# Altium PCB MCB4.PcbDoc
Units mm, origin at the board's own origin, x right, y up, seen from the top; angles counter-clockwise.
Board outline 35.94 x 20.12 mm, 2 copper layers (Top Layer, Bottom Layer); 55 components, 61 nets, 267 pads, 169 vias.
Unrouted connection lines stored in the file: 1.
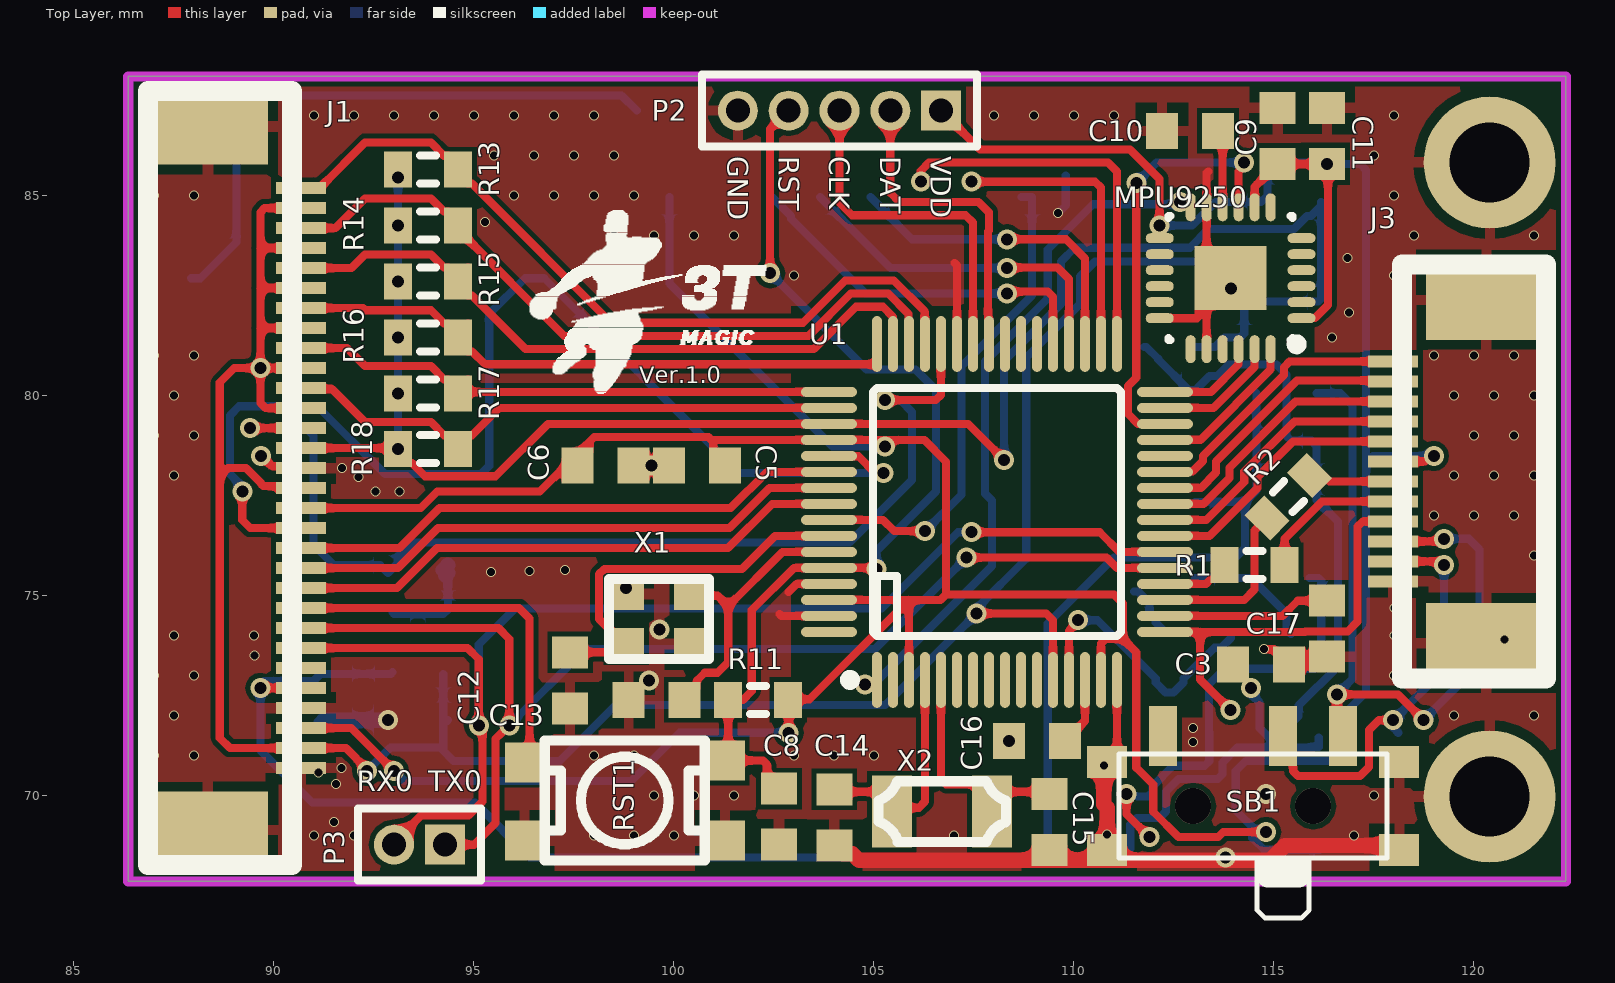
[diagram p0: Top Layer view]
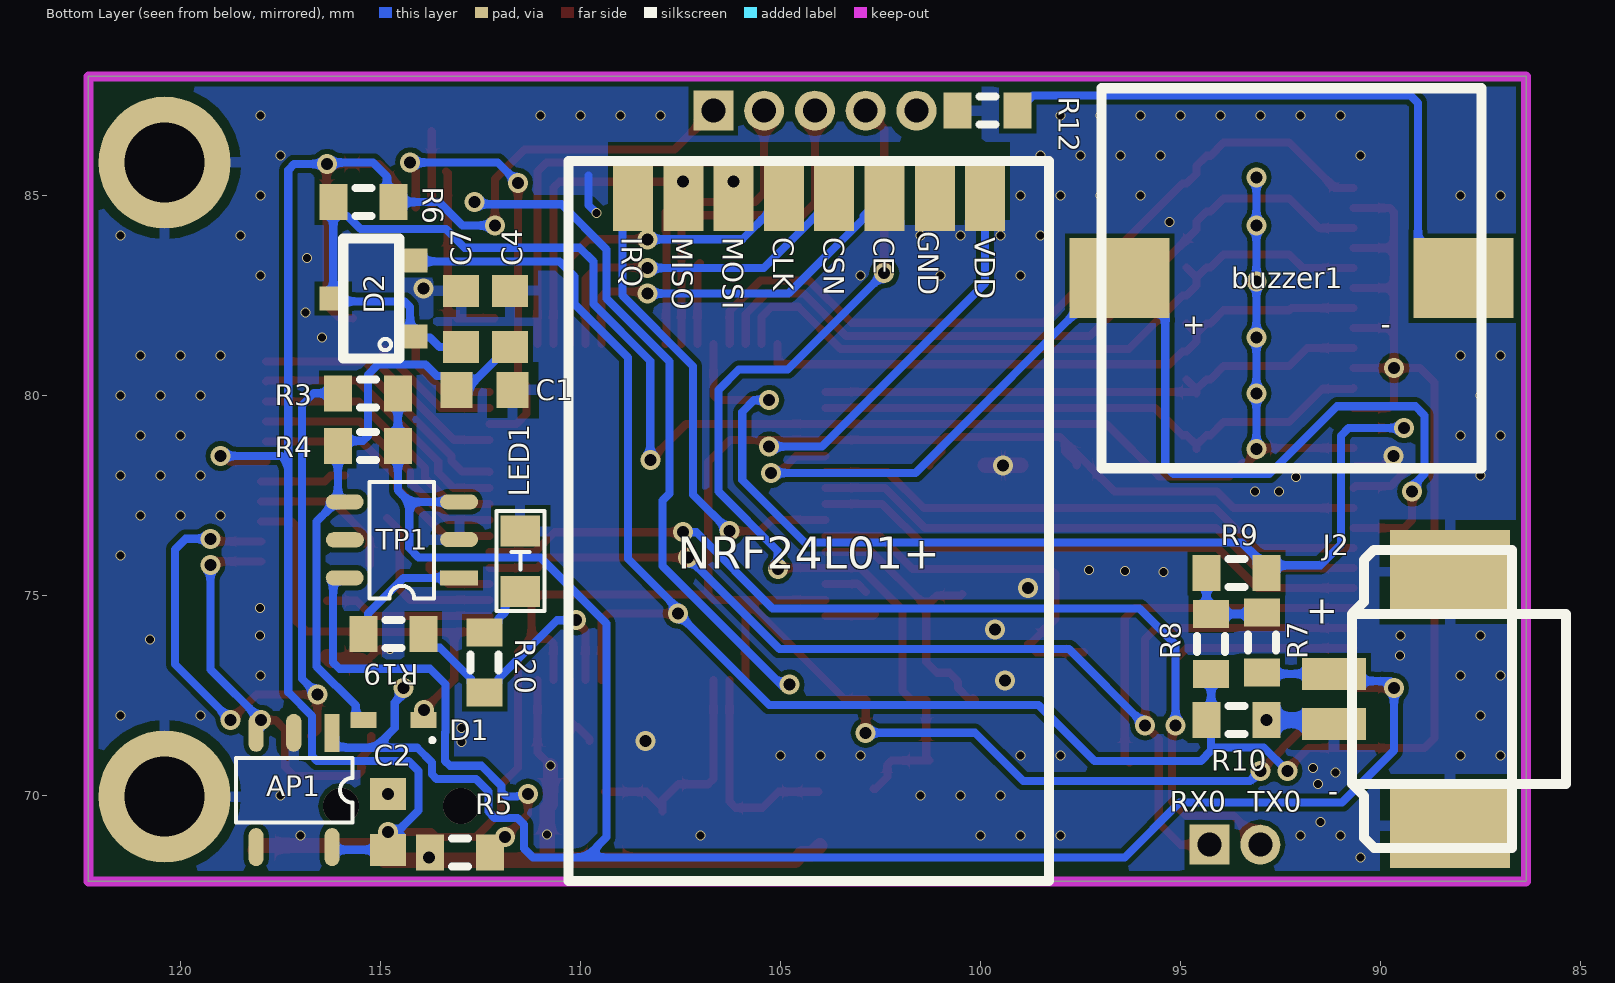
[diagram p1: Bottom Layer view, seen from below]

## Layer stack, top to bottom
Top Solder: solder mask 0.0102, Solder Resist, Dk 3.5
Top Layer: signal copper 0.0356
Dielectric 1: dielectric 0.32, FR-4, Dk 4.8
Bottom Layer: signal copper 0.0356
Bottom Solder: solder mask 0.0102, Solder Resist, Dk 3.5

## Board outline
86.36,67.853 86.36,87.975 122.301,87.975 122.301,67.853

## Design rules (kind name [scope] priority, off if disabled: settings)
Clearance [All] p1: gap=0.127 ignorepadtopadclearanceinfootprint=FALSE
PolygonConnect [All] p1: connectstyle=Relief reliefconductorwidth=0.254 reliefentries=4 polygonreliefangle="90 Angle" airgapwidth=0.254
RoutingVias [All] p1: holewidth=0.711 width=1.27 viastyle="Through Hole" minholewidth=0.2 minwidth=0 maxholewidth=1.016 maxwidth=1.27
SolderMaskExpansion [All] p1: expansion=0.102
Width [All] p1: maxlimit=1.016 minlimit=0.178 preferedwidth=0.254
30 further rules are at their usual default settings.

## Components (designator, comment, footprint, x,y, rotation, side; value= is the part's Value field where it differs from the comment)
AP1 "AP2112" SOT-23-5 115.7,70.937 r270 bottom
buzzer1 "Buzzer" HN9650B-3 96.93,78.266 r90 bottom
C1 "Cap Semi" 1608[0603] 112.395,80.137 r0 bottom value=10uF
C2 "Cap Semi" 1608[0603] 114.808,69.342 r270 bottom value=1uF
C3 "Cap Semi" 1608[0603] 114.681,73.279 r180 top value=10uF
C4 "Cap Semi" 1608[0603] 111.76,81.915 r270 bottom value=1uF
C5 "Cap Semi" 1608[0603] 100.58,78.255 r0 top value=10uF
C6 "Cap Semi" 1608[0603] 98.294,78.255 r180 top value=0.1uF
C7 "Cap Semi" 1608[0603] 112.982,81.915 r270 bottom value=1uF
C8 "Cap Semi" 1608[0603] 102.628,69.469 r90 top value=0.1uF
C9 "Cap Semi" 1608[0603] 115.09,86.487 r270 top value=10nF
C10 "Cap Semi" 1608[0603] 112.903,86.614 r0 top value=0.1uF
C11 "Cap Semi" 1608[0603] 116.332,86.487 r270 top value=0.1uF
C12 "Cap Semi" 1608[0603] 97.409,72.88 r270 top value=20pF
C13 "Cap Semi" 1608[0603] 99.568,72.39 r180 top value=20pF
C14 "Cap Semi" 1608[0603] 104.013,69.452 r270 top value=20pF
C15 "Cap Semi" 1608[0603] 109.387,69.342 r270 top value=20pF
C16 "Cap Semi" 1608[0603] 109.077,71.36 r0 top value=1uF
C17 "Cap Semi" 1608[0603] 116.332,74.168 r90 top value=1uF
D1 "Schottky" SOD-523 114.681,71.882 r0 bottom
D2 "Vref" SOT-23 116.181,82.423 r90 bottom
J1 "Plug8" FPC0.5-30PS 90.678,85.185 r270 top
J2 "Plug2" Terminal_block_2pin_1.25mm_SMD 88.265,72.39 r270 bottom
J3 "Plug8" FPC0.5-12PS 117.983,75.351 r90 top
LED1 "RED" SMD-0603_LED 111.506,76.608 r270 bottom
MPU9250 "24Pin" "QFN_24PIN _1" 113.919,82.931 r180 top (schematic designator MPU-1)
NRF24L01+ "NRF24L01" NRF24L01_Module_SMD 98.286,67.863 r0 bottom (schematic designator NRF*1)
P2 "MHDR1X5" MHDR1X5 106.68,87.122 r180 top
P3 "MHDR1X2" MHDR1X2 94.275,68.769 r180 top
R1 "Res3" J1-0603 114.519,75.759 r0 top value=33
R2 "Res3" J1-0603 115.363,77.47 r45 top value=33
R3 "Res3" J1-0603 115.316,80.055 r0 bottom value=100K
R4 "Res3" J1-0603 115.316,78.74 r180 bottom value=100k
R5 "Res3" J1-0603 113.013,68.58 r180 bottom value=1.65k
R6 "Res3" J1-0603 115.431,84.836 r180 bottom value=1K
R7 "Res3" J1-0603 92.964,73.83 r270 bottom value=75k
R8 "Res3" J1-0603 94.234,73.787 r90 bottom value=100k
R9 "Res3" J1-0603 93.599,75.565 r0 bottom value=100k
R10 "Res3" J1-0603 93.599,71.882 r0 bottom value=0
R11 "Res3" J1-0603 102.108,72.39 r180 top value=10K
R12 "Res3" J1-0603 99.822,87.122 r180 bottom value=100
R13 "Res3" J1-0603 93.853,85.643 r180 top value=10K
R14 "Res3" J1-0603 93.853,84.246 r180 top value=10K
R15 "Res3" J1-0603 93.853,82.849 r180 top value=10K
R16 "Res3" J1-0603 93.853,81.452 r180 top value=10K
R17 "Res3" J1-0603 93.853,80.055 r180 top value=10K
R18 "Res3" J1-0603 93.853,78.658 r180 top value=10K
R19 "Res3" J1-0603 114.681,74.041 r180 bottom value=160
R20 "Res3" J1-0603 112.395,73.322 r270 bottom value=870
RST1 "SPST" "TACK-SW_SMD 2P 4x3mm_2" 100.773,71.374 r270 top
SB1 "SPDT" SS-SK-02P 114.427,69.723 r0 top
TP1 "TP-4057" SOT-23-6 113.665,74.93 r0 bottom
U1 "NUC240SE3AE" MCU_LQFP_64_7x7 108.077,77.089 r90 top
X1 "Xtal" 2520S 98.807,75.037 r0 top value=12M
X2 "Xtal" FC-135 106.36,67.896 r0 top value=32.768k

## Footprints (in the part's own frame and the unit in brackets; to place one, negate y for a bottom-side part, rotate by r counter-clockwise, add the part's x,y. Pads: shape width x height; smd on the part's side, far side on the other; paste and mask are expansions set on the pad)
1608[0603] [mm] "Chip Capacitor, Body 1.6x0.8mm, IPC High Density"
  rect 0.8x0.9 smd: 1(-0.7,0) 2(0.7,0)
  body extent -0.87,-0.48 0.87,0.48, height 1.3
2520S [mm]
  rect 0.9x0.8 smd: 1(0,-1.25) 2(1.65,0) ""(0,0) ""(1.65,-1.25)
  silkscreen extent -0.43,-1.63 2.07,0.37
FC-135 [mm]
  rect 1x1.8 smd: 1(-0.91,1.7) 2(1.59,1.7)
  silkscreen extent -1.24,0.94 1.94,2.46
FPC0.5-12PS [mm]
  rect 0.3x1.25 smd: 1(0,0) 2(0.5,0) 3(1,0) 4(1.5,0) 5(2,0) 6(2.5,0) 7(3,0) 8(3.5,0) 9(4,0) 10(4.5,0) 11(5,0) 12(5.5,0)
  rect 2x3 smd: ""(-1.54,-2.325) ""(7.04,-2.325)
  silkscreen extent -2.43,-3.82 7.92,-0.22
FPC0.5-30PS [mm]
  rect 0.3x1.25 smd: 1(0,0) 2(0.5,0) 3(1,0) 4(1.5,0) 5(2,0) 6(2.5,0) 7(3,0) 8(3.5,0) 9(4,0) 10(4.5,0) 11(5,0) 12(5.5,0) 13(6,0) 14(6.5,0) 15(7,0) 16(7.5,0) 17(8,0) 18(8.5,0) 19(9,0) 20(9.5,0) 21(10,0) 22(10.5,0) 23(11,0) 24(11.5,0) 25(12,0) 26(12.5,0) 27(13,0) 28(13.5,0) 29(14,0) 30(14.5,0)
  rect 1.9x3 smd: ""(-1.54,-2.325) ""(16.04,-2.325)
  silkscreen extent -2.42,-3.83 16.93,-0.23
HN9650B-3 [mm]
  rect 2x2.5 smd: 1(4.665,-0.41) 2(4.665,-9.005)
  silkscreen extent -0.08,-9.46 9.42,0.04
J1-0603 [mm] "Chip Resistor, Body 1.6x0.8mm, IPC High Density"
  rect 0.7x0.9 smd: 1(-0.75,0) 2(0.75,0)
  silkscreen extent -0.2,-0.35 0.2,0.35, body extent -0.85,-0.48 0.85,0.48, height 0.9
MCU_LQFP_64_7x7 [mm]
  oval 1.4x0.25 smd: 1(-4.2,3) 2(-4.2,2.6) 3(-4.2,2.2) 4(-4.2,1.8) 5(-4.2,1.4) 6(-4.2,1) 7(-4.2,0.6) 8(-4.2,0.2) 9(-4.2,-0.2) 10(-4.2,-0.6) 11(-4.2,-1) 12(-4.2,-1.4) 13(-4.2,-1.8) 14(-4.2,-2.2) 15(-4.2,-2.6) 16(-4.2,-3) 33(4.2,-3) 34(4.2,-2.6) 35(4.2,-2.2) 36(4.2,-1.8) 37(4.2,-1.4) 38(4.2,-1) 39(4.2,-0.6) 40(4.2,-0.2) 41(4.2,0.2) 42(4.2,0.6) 43(4.2,1) 44(4.2,1.4) 45(4.2,1.8) 46(4.2,2.2) 47(4.2,2.6) 48(4.2,3)
  oval 0.25x1.4 smd: 17(-3,-4.2) 18(-2.6,-4.2) 19(-2.2,-4.2) 20(-1.8,-4.2) 21(-1.4,-4.2) 22(-1,-4.2) 23(-0.6,-4.2) 24(-0.2,-4.2) 25(0.2,-4.2) 26(0.6,-4.2) 27(1,-4.2) 28(1.4,-4.2) 29(1.8,-4.2) 30(2.2,-4.2) 31(2.6,-4.2) 32(3,-4.2) 49(3,4.2) 50(2.6,4.2) 51(2.2,4.2) 52(1.8,4.2) 53(1.4,4.2) 54(1,4.2) 55(0.6,4.2) 56(0.2,4.2) 57(-0.2,4.2) 58(-0.6,4.2) 59(-1,4.2) 60(-1.4,4.2) 61(-1.8,4.2) 62(-2.2,4.2) 63(-2.6,4.2) 64(-3,4.2)
  silkscreen extent -4.32,-3.1 3.1,3.8, body extent -3.5,-3.5 3.5,3.5, height 1.6
MHDR1X2 [mm] "Connector; Header; 2 Position"
  rect 1x1 hole 0.6: 1(0,0)
  round 1 hole 0.6: 2(1.27,0)
  silkscreen extent -0.9,-0.9 2.17,0.9
MHDR1X5 [mm] "Connector; Header; 5 Position"
  rect 1x1 hole 0.6: 1(0,0)
  round 1 hole 0.6: 2(1.27,0) 3(2.54,0) 4(3.81,0) 5(5.08,0)
  silkscreen extent -0.9,-0.9 5.98,0.9
NRF24L01_Module_SMD [mm]
  rect 1x1.7 smd: 1(1.6,-17.1) 2(2.857,-17.1) 3(4.114,-17.1) 4(5.371,-17.1) 5(6.629,-17.1) 6(7.886,-17.1) 7(9.143,-17.1) 8(10.4,-17.1)
  silkscreen extent 0,-18 12.02,0
"QFN_24PIN _1" [mm]
  oval 0.7x0.249 smd: 1(-1.772,1) 2(-1.772,0.6) 3(-1.772,0.2) 4(-1.772,-0.2) 5(-1.772,-0.6) 6(-1.772,-1) 13(1.772,-1) 14(1.772,-0.6) 15(1.772,-0.2) 16(1.772,0.2) 17(1.772,0.6) 18(1.772,1)
  oval 0.249x0.7 smd: 7(-1,-1.772) 8(-0.6,-1.772) 9(-0.2,-1.772) 10(0.2,-1.772) 11(0.6,-1.772) 12(1,-1.772) 19(1,1.772) 20(0.6,1.772) 21(0.2,1.772) 22(-0.2,1.772) 23(-0.6,1.772) 24(-1,1.772)
  rect 1.8x1.6 smd: 25(0,0)
  silkscreen extent -1.77,-1.55 1.55,1.78, body extent -1.55,-1.55 1.55,1.55, height 1
SMD-0603_LED [mm]
  rect 0.78x0.98 smd: 1(0,0) 2(1.51,0)
  silkscreen extent -0.5,-0.6 2,0.6
SOD-523 [mm] "SODFL, 2-Leads, Body 0.80x1.60mm, IPC Medium Density"
  rect 0.65x0.4 smd: 1(-0.75,0) 2(0.75,0)
  silkscreen extent -1.02,0.45 -0.93,0.55, body extent -0.65,-0.45 0.65,0.45, height 0.65
SOT-23 [mm]
  rect 0.6x0.7 smd: 1(-0.95,-2) 2(0,0) 3(0.95,-2)
  silkscreen extent -1.5,-1.65 1.5,-0.25
SOT-23-5 [mm]
  rect 0.95x0.38 smd: 1(-0.63,-0.51)
  oval 0.95x0.38 smd: 2(-0.63,-1.47) 3(-0.63,-2.41) 4(2.23,-2.41) 5(2.23,-0.51)
  silkscreen extent 0,-2.91 1.61,0
SOT-23-6 [mm]
  rect 0.95x0.38 smd: 1(-0.63,-0.51)
  oval 0.95x0.38 smd: 2(-0.63,-1.47) 3(-0.63,-2.41) 4(2.23,-2.41) 5(2.227,-1.461) 6(2.23,-0.51)
  silkscreen extent 0,-2.91 1.61,0
SS-SK-02P [mm]
  rect 0.7x1.5 smd: 1(-2.195,1.76) 2(0.805,1.76) 3(2.305,1.76)
  rect 1x0.8 smd: ""(-3.595,-1.09) ""(-3.595,1.11) ""(3.705,-1.09) ""(3.705,1.11)
  silkscreen extent -3.29,-2.79 3.41,1.31
"TACK-SW_SMD 2P 4x3mm_2" [mm]
  rect 1x1 smd: 1(0.5,0.5) 1(0.55,-4.5) 2(2.5,0.5) 2(2.5,-4.5)
  silkscreen extent 0,-4 3,0
Terminal_block_2pin_1.25mm_SMD [mm]
  rect 0.8x1.6 smd: 1(-0.65,-2.9) 2(0.6,-2.9)
  rect 2.1x3 smd: ""(-3.2,0) ""(3.15,0)
  silkscreen extent -3.75,-2.45 3.7,2.9

## Part data
C1 C2 C3 C4 C5 C6 C7 C8 C9 C10 C11 C12 C13 C14 C15 C16 C17: "Capacitor (Semiconductor SIM Model)", LatestRevisionDate=29-May-2009, LatestRevisionNote="IPC-7351 Footprint Added.", PackageDescription="Chip Capacitor", PackageReference=C1206, Published=8-Jun-2000, Publisher="Altium Limited"
D1: library part Diode2
J1: library part Plug30
J3: library part Plug12
LED1: library part LED
MPU9250: library part MPU-9250_2
NRF24L01+: library part NRF24L01_module
P2: "Header, 5-Pin", LatestRevisionDate=17-Jul-2002, LatestRevisionNote="Re-released for DXP Platform.", Publisher="Altium Limited"
P3: "Header, 2-Pin", LatestRevisionDate=17-Jul-2002, LatestRevisionNote="Re-released for DXP Platform.", Publisher="Altium Limited"
R1 R2 R3 R4 R5 R6 R7 R8 R9 R10 R11 R12 R13 R14 R15 R16 R17 R18 R19 R20: "Resistor", LatestRevisionDate=29-May-2009, LatestRevisionNote="IPC-7351 Footprint Added.", PackageDescription="Chip Resistor", PackageReference=J1-0603, Published=8-Jun-2000, Publisher="Altium Limited"
RST1: library part Switch_Button1
SB1: library part Switch_Button2
U1: OriginalSymbolOrigin=(0,0)

## Free pads (board coordinates)
  round 3.3 hole 2: ""(120.396,69.974) ""(120.396,85.823)

## Via types
v1: diameter 0.25, hole 0.2, Top Layer to Bottom Layer, tented both sides, 109 vias
v2: diameter 0.5, hole 0.3, Top Layer to Bottom Layer, tented both sides, 58 vias
v3: diameter 0.9, hole 0.9, Top Layer to Bottom Layer, 2 vias

## Nets (pads, with @x,y where several pads share a name; then routed paths per layer and width w, separated by ;. In a path a pad name is that pad's centre, name@x,y a point inside that pad or via, vN(x,y) a via of type N, cw(c..) or ccw(c..) an arc to the next point about the centre after c; other vN are vias at no path point)
ADC0: J1.13 R9.1 U1.44 | length 27.2
  Top Layer w0.203: v2(89.408,79.185) J1.13 ; v2(105.283,79.883) 106.547,79.883 106.677,80.013 U1.44
  Bottom Layer w0.203: v2(89.408,79.185) 90.798,79.185 90.988,78.994 90.988,76.271 91.505,75.754 92.66,75.754 R9.1 93.097,75.813 93.097,75.952 93.472,76.327 104.394,76.327 105.957,77.89 105.957,79.59 105.664,79.883 v2(105.283,79.883)
ADC1: J1.1 R13.1 U1.45 | length 19.6
  Top Layer w0.203: J1.1 91.153,85.185 91.201,85.233 91.201,85.242 92.281,86.322 93.924,86.322 94.255,85.991 94.355,85.991 94.603,85.743 R13.1 94.603,85.543 94.851,85.295 94.951,85.295 98.427,81.819 103.225,81.819 104.284,82.878 105.497,82.878 106.268,82.107 106.268,81.298 U1.45
ADC2: J1.3 R14.1 U1.46 | length 18.4
  Top Layer w0.203: J1.3 91.541,84.185 92.281,84.925 93.924,84.925 94.255,84.594 94.355,84.594 94.603,84.346 94.603,84.146 97.26,81.489 103.361,81.489 104.42,82.548 105.36,82.548 105.868,82.04 105.868,81.298 U1.46
ADC3: J1.5 R15.1 U1.47 | length 17.6
  Top Layer w0.203: J1.5 91.938,83.185 92.281,83.528 93.924,83.528 94.255,83.197 94.355,83.197 R15.1@94.603,82.949 ; R15.1@94.851,83.197 R15.1@94.603,82.949 ; U1.47 105.477,81.964 105.223,82.218 104.557,82.218 103.498,81.159 96.293,81.159 94.951,82.501 94.851,82.501 94.603,82.749 R15.1 R15.1@94.603,82.949
ADC4: J1.7 R16.1 U1.48 | length 15.9
  Top Layer w0.203: J1.7 92.227,82.185 92.281,82.131 93.924,82.131 94.255,81.8 94.355,81.8 R16.1@94.603,81.552 ; R16.1@94.851,81.8 R16.1@94.603,81.552 ; U1.48 105.077,80.802 105.055,80.78 95.275,80.78 94.951,81.104 94.851,81.104 94.603,81.352 R16.1 R16.1@94.603,81.552
ADC5: J1.9 R17.1 U1.49 | length 14.1
  Top Layer w0.203: J1.9 91.83,81.185 92.281,80.734 93.924,80.734 94.255,80.403 94.355,80.403 R17.1@94.603,80.155 ; R17.1@94.851,80.403 R17.1@94.603,80.155 ; U1.49 94.637,80.089 R17.1 R17.1@94.603,80.155
ADC6: J1.11 R18.1 U1.50 | length 14.3
  Top Layer w0.203: J1.11 90.7,80.162 91.456,80.162 92.281,79.337 93.924,79.337 94.255,79.006 94.355,79.006 R18.1@94.603,78.758 ; R18.1 R18.1@94.603,78.758 ; U1.50 95.634,79.689 94.951,79.006 94.851,79.006 R18.1@94.603,78.758
ADC_ONOFF: D2.3 J1.2 J1.4 J1.6 J1.8 J1.10 J1.12 J1.16 J1.29 R8.1 R10.2 U1.12 | length 63.7
  Top Layer w0.203: J1.16 90.63,77.733 89.734,77.733 89.688,77.779 89.688,77.795 89.299,78.185 88.853,78.185 88.646,77.978 ; J1.12 89.793,79.685 89.662,79.816 v2(89.662,80.685) ; J1.10 v2(89.662,80.685) ; J1.8 89.662,81.685 ; J1.6 89.662,82.685 ; J1.4 89.662,83.685 ; J1.2 89.768,84.685 89.662,84.579 89.662,83.685 ; v2(92.329,70.612) 92.329,70.654 91.798,71.185 J1.29 88.9,71.185 88.646,71.439 88.646,77.978 ; v2(107.569,74.549) 109.309,74.549 109.477,74.381 U1.12 ; 88.646,77.978 88.646,80.321 89.01,80.685 v2(89.662,80.685) ; v2(89.662,80.685) 89.662,81.685 ; 89.662,81.685 89.662,82.685 ; 89.662,82.685 89.662,83.685
  Bottom Layer w0.203: v2(92.329,70.612) 92.919,71.203 94.234,71.203 ; R8.1 R10.2@94.234,71.767 ; R10.2 R10.2@94.234,71.767 ; D2.3@114.181,83.352 110.53,83.352 110.149,82.971 110.149,82.29 108.81,80.951 108.81,75.917 107.569,74.676 v2(107.569,74.549) 105.283,72.263 98.546,72.263 97.147,70.863 94.491,70.863 94.234,71.12 94.234,71.203 ; 94.234,71.203 R10.2@94.234,71.767
AVDD: AP1.5 C2.2 C5.2 C6.2 C9.2 C11.2 J1.17 J1.28 J3.7 MPU9250.1 MPU9250.8 MPU9250.13 NRF24L01+.1 P2.1 R6.2 R11.1 U1.3 U1.15 U1.52 U1.62 | length 114.2
  Top Layer w0.203: J1.28 91.933,71.685 v2(93.005,70.612) ; J1.17 93.673,77.185 94.085,77.597 96.647,77.597 97.892,78.842 ; C6.2 97.594,78.305 97.892,78.603 97.892,78.842 ; C5.2 101.28,78.305 100.982,78.603 100.982,78.842 100.935,78.889 ; v2(102.87,71.567) 102.87,72.378 R11.1 102.874,72.406 103.394,72.406 105.877,74.889 ; U1.62 105.877,74.889 ; U1.3 105.877,74.889 ; P2.1 107.649,86.153 111.399,86.153 112.141,85.411 v2(112.141,84.248) ; U1.15 110.677,73.795 110.796,73.914 111.224,73.914 ; MPU9250.8 114.519,85.216 114.742,85.439 114.742,85.489 115.04,85.787 C9.2 v2(116.332,85.787) 116.351,85.768 116.351,82.266 116.025,81.94 115.7,81.94 MPU9250.1 ; v2(114.808,69.088) 113.735,69.088 113.608,68.961 112.615,68.961 111.985,69.592 111.985,70.269 111.561,70.693 111.561,73.578 111.224,73.914 ; J3.7@117.856,78.351 J3.7 118.781,78.351 118.919,78.489 v2(118.999,78.489) ; 97.892,78.842 98.009,78.959 100.865,78.959 100.935,78.889 ; 100.935,78.889 U1.52 106.261,78.889 106.807,78.343 106.807,75.028 ; 105.877,74.889 106.668,74.889 106.807,75.028 ; 106.807,75.028 111,75.028 111.224,74.803 111.224,73.914
  Bottom Layer w0.203: v2(93.005,70.612) 93.259,70.358 98.933,70.358 100.142,71.567 v2(102.87,71.567) ; NRF24L01+.1 99.886,82.795 103.962,78.72 v2(105.283,78.72) ; v2(112.141,84.248) 112.95,84.248 113.538,84.836 R6.2 114.838,84.993 114.838,85.472 115.189,85.823 116.296,85.823 v2(116.332,85.787) 117.159,85.787 117.305,85.641 117.305,78.316 ; v2(114.808,69.088) v2@114.586,69.088 ; AP1.5 116.145,68.642 C2.2 114.758,68.642 114.46,68.94 114.46,68.99 114.557,69.088 v2@114.586,69.088 ; v2(118.999,78.489) 117.478,78.489 117.305,78.316 ; v2@114.586,69.088 114.046,69.628 114.046,70.612 114.297,70.863 116.583,70.863 116.713,70.993 116.713,71.987 117.305,72.579 117.305,78.316
button: J3.12 U1.27 | length 6.9
  Top Layer w0.203: U1.27 112.286,78.098 112.961,78.098 113.227,78.364 113.227,78.487 115.249,80.509 115.249,80.705 115.395,80.851 J3.12@117.856,80.851
buzzer: buzzer1.1 J1.18 U1.53 | length 29.2
  Top Layer w0.203: v2(89.21,77.597) 89.21,76.883 89.408,76.685 J1.18 ; U1.53 103.886,78.48 104.612,78.48 105.028,78.064 v2(105.242,78.064)
  Bottom Layer w0.203: v2(89.21,77.597) 89.21,77.724 88.9,78.034 88.9,79.502 89.128,79.73 91.085,79.73 92.781,78.034 95.179,78.034 95.383,78.238 95.383,82.033 96.281,82.931 buzzer1.1 96.759,82.931 101.626,78.064 v2(105.242,78.064)
CHRG: R19.2 R20.2 U1.13 | length 6.9
  Top Layer w0.203: U1.13 109.877,74.114 110.108,74.344 v2(110.108,74.381)
  Bottom Layer w0.203: v2(110.108,74.381) 110.586,74.381 112.047,72.92 112.047,72.82 112.295,72.572 R20.2 112.495,72.572 112.743,72.82 112.743,72.92 113.516,73.693 113.683,73.693 113.931,73.941 R19.2
D12I: C13.1 U1.59 X1.2 | length 7.1
  Top Layer w0.203: C13.1@100.141,72.387 C13.1@100.183,72.429 ; C13.1 100.566,72.688 100.566,72.84 100.584,72.857 100.584,72.88 100.773,73.069 101.092,73.069 101.358,73.335 101.358,74.729 ; X1.2 100.5,74.994 101.093,74.994 101.358,74.729 ; U1.59 102.718,76.089 101.358,74.729
D12O: C12.1 U1.58 X1.1 | length 9.7
  Top Layer w0.203: C12.1 98.6,73.58 X1.1 98.757,73.787 98.128,74.416 98.128,75.532 98.262,75.666 101.701,75.666 102.524,76.489 U1.58
D+: R1.1 U1.20 | length 1.7
  Top Layer w0.203: U1.20 113.299,75.289 113.421,75.41 113.521,75.41 113.769,75.659 R1.1
D-: R2.1 U1.19 | length 4.3
  Top Layer w0.203: U1.19 114.259,74.889 114.519,75.149 114.519,76.626 R2.1
DVBUS: D1.1 J3.4 U1.17 | length 10.6
  Top Layer w0.203: U1.17 113.157,74.089 ; v2@113.953,72.17 v2(113.919,72.136) 113.157,72.898 113.157,74.089 ; J3.4 117.221,76.851 117.094,76.724 117.094,74.344 116.846,74.097 115.787,74.097 115.78,74.089 113.157,74.089
GND: AP1.2 C1.1 C2.1 C3.1 C4.1 C5.1 C6.1 C7.1 C8.1 C9.1 C10.1 C11.1 C12.2 C13.2 C14.2 C15.2 C16.1 C17.1 J1. J1.15 J1.27 J1.30 J2. J2.2 J3. J3.1 LED1.1 MPU9250.11 MPU9250.18 MPU9250.20 MPU9250.25 NRF24L01+.2 P2.5 pad. R5.1 R10.1 R12.1 RST1.2 SB1. TP1.2 U1.16 U1.43 U1.61 U1.63 X1. | length 35.6
  Top Layer w0.203: v2(89.679,78.489) 89.69,78.489 89.946,78.233 90.63,78.233 J1.15 ; 102.64,74.539 102.69,74.489 U1.63 ; 102.869,75.09 103.067,75.289 U1.61 ; 107.02,83.312 107.077,83.255 U1.43 ; v1(110.749,70.75) 110.832,70.833 111.077,71.078 U1.16 ; MPU9250.18 113.081,81.931 MPU9250.25@113.319,82.169 ; MPU9250.20 MPU9250.25@113.319,82.169 ; 113.359,85.602 113.319,85.563 MPU9250.11 MPU9250.25@113.319,82.169 ; v1(114.758,73.658) 115.002,73.658 115.033,73.627 115.083,73.627 115.381,73.329 C3.1
  Top Layer w0.381: C6.1 C5.1 ; C14.2 104.223,68.542 104.469,68.542 104.632,68.378 114.901,68.378 115.274,68.752 118.013,68.752 SB1.@118.132,68.633 ; v1(110.749,70.75) 110.749,69.774 110.832,69.692 SB1.@110.832,68.633 ; C3.1 115.476,73.374 116.237,73.374 C17.1
  Bottom Layer w0.203: v1(109.601,84.558) 109.798,84.755 109.798,85.501
  Bottom Layer w0.381: J2.2 91.257,71.882 v2(92.849,71.882)
  other v1: 90.5,68.453 91,69 92,69 98,69 99,69 100,69 107,69 117,69 110.832,69.027 91.505,69.342 99.5,70 100.5,70 101.5,70 117.5,70 91.557,70.281 91.121,70.578 91.694,70.684 87,71 88,71 98,71 99,71 103,71 104,71 105,71 112.972,71.334 112.972,71.683 87.5,72 119.5,72 121.5,72 87,73 88,73 118,73 89.515,73.495 120.769,73.893 87.5,74 89.5,74 118.011,73.997 118.013,74.685 95.428,75.589 96.393,75.615 97.282,75.639 121.5,76 119,77 120,77 121,77 92.536,77.597 93.142,77.597 92.117,77.962 87.5,78 119.5,78 120.5,78 121.5,78 91.702,78.185 87,79 88,79 120,79 121,79 87.5,80 119.5,80 120.5,80 121.5,80 87,81 88,81 119,81 120,81 121,81 116.459,81.452 116.878,82.072 99,83 101,83 103,83 118,83 116.84,83.439 98.5,84 99.5,84 100.5,84 101.5,84 118.5,84 121.5,84 95.275,84.341 87,85 88,85 96,85 97,85 98,85 99,85 118,85 90.5,86 95.5,86 96.5,86 97.5,86 98.5,86 117.5,86 91,87 92,87 93,87 94,87 95,87 96,87 97,87 98,87 108,87 109,87 110,87 111,87 118,87
  other v2: 113.792,68.453 114.808,70.042 108.377,71.36 99.384,72.88 99.641,74.144 98.807,75.185 99.437,78.255 113.931,82.669
ICE_CLK: P2.3 U1.42 | length 8.9
  Top Layer w0.203: P2.3 104.14,84.819 104.453,84.506 107.294,84.506 107.477,84.323 U1.42
ICE_DAT: P2.2 U1.41 | length 8
  Top Layer w0.203: P2.2 105.41,85.068 105.642,84.836 107.62,84.836 107.877,84.579 107.877,84.127 107.852,84.102 107.852,81.314 U1.41
LED1: J3.8 U1.23 | length 6.7
  Top Layer w0.203: U1.23 113.392,76.489 114.589,77.686 114.589,77.962 115.478,78.851 J3.8@117.856,78.851
LED2: J3.9 U1.24 | length 6.8
  Top Layer w0.203: U1.24 113.309,76.889 114.259,77.839 114.259,78.098 115.512,79.351 J3.9@117.856,79.351
LED3: J3.10 U1.25 | length 6.8
  Top Layer w0.203: U1.25 113.242,77.289 113.887,77.934 113.887,78.194 115.545,79.851 J3.10@117.856,79.851
LED4: J3.11 U1.26 | length 6.9
  Top Layer w0.203: U1.26 113.175,77.689 113.557,78.071 113.557,78.35 115.58,80.373 117.834,80.373 J3.11@117.856,80.351
MPU_INT: MPU9250.12 U1.1 | length 16.8
  Top Layer w0.203: U1.1@105.068,72.88 U1.1
  Bottom Layer w0.203: v2(104.775,72.771) 104.987,72.771 107.95,75.734 107.95,77.371 107.777,77.544 107.777,80.852 109.347,82.422 109.347,83.649 110.477,84.779 112.592,84.779 v2(112.649,84.836)
Netbuzzer1_2: buzzer1.2 R12.2 | length 15.2
  Bottom Layer w0.203: buzzer1.2 88.164,82.931 89.062,83.829 89.062,87.311 89.255,87.503 98.691,87.503 R12.2
NetC10_2: C10.2 MPU9250.10 | length 1.9
  Top Layer w0.203: MPU9250.10 113.719,86.603 C10.2@113.73,86.614
NetC16_2: C16.2 U1.14 | length 1.8
  Top Layer w0.203: C16.2 109.777,71.41 110.075,71.709 110.125,71.709 110.277,71.86 U1.14
NetC17_2: C17.2 U1.18 | length 4.2
  Top Layer w0.203: U1.18 115.217,74.489 115.596,74.868 C17.2
NetJ3_5: J3.5 R1.2 | length 3.8
  Top Layer w0.203: R1.2 115.269,76.416 116.204,77.351 J3.5
NetJ3_6: J3.6 R2.2 | length 2.2
  Top Layer w0.203: R2.2 116.245,78 116.394,77.851 J3.6
NetLED1_2: LED1.2 R20.1 | length 1.5
  Bottom Layer w0.203: LED1.2 111.601,75.098 111.89,74.81 111.89,74.577 112.047,74.42 112.047,74.32 112.295,74.072 R20.1
NetR5_2: R5.2 TP1.6 | length 11.2
  Top Layer w0.203: v2(111.317,70.042) 111.317,69.531 v2(111.887,68.961)
  Bottom Layer w0.203: v2(111.317,70.042) 111.374,69.985 111.573,69.985 111.584,69.974 111.854,69.974 111.973,70.093 111.973,70.24 112.475,70.742 113.264,70.742 113.386,70.863 113.386,71.579 113.377,71.587 113.377,72.779 113.765,73.167 116.029,73.167 116.184,73.322 116.184,75.375 116.12,75.44 TP1.6
NetR7_1: R7.1 R8.2 R9.2 | length 2.6
  Bottom Layer w0.203: R7.1 93.007,74.537 R8.2 94.349,74.652 R9.2
  Bottom Layer w0.381: R9.2@94.234,75.639 R9.2@94.349,75.754 ; R9.2@94.292,75.507 R9.2
NetR19_1: R19.1 TP1.1 | length 3.2
  Bottom Layer w0.203: TP1.1 114.425,75.44 115.315,74.55 115.315,74.157 R19.1
NRF_CE: NRF24L01+.3 U1.37 | length 9.4
  Top Layer w0.203: v2(108.331,82.55) 108.378,82.597 109.347,82.597 109.477,82.467 U1.37
  Bottom Layer w0.203: NRF24L01+.3 102.451,84.963 102.929,84.484 102.929,84.418 104.797,82.55 v2(108.331,82.55)
NRF_IRQ: NRF24L01+.8 U1.57 | length 12.2
  Top Layer w0.203: U1.57 105.229,76.889 105.51,76.608 v2(106.277,76.608)
  Bottom Layer w0.203: v2(106.277,76.608) 107.188,77.519 107.188,80.73 108.954,82.497 108.954,84.963 NRF24L01+.8
PC6: J1.19 U1.54 | length 14
  Top Layer w0.203: J1.19 93.139,76.185 94.139,77.185 101.42,77.185 102.325,78.089 U1.54
PC14: J1.21 U1.56 | length 14.1
  Top Layer w0.203: J1.21 93.073,75.185 94.073,76.185 101.354,76.185 102.459,77.289 U1.56
PC15: J1.20 U1.55 | length 14
  Top Layer w0.203: J1.20 93.106,75.685 94.106,76.685 101.387,76.685 102.392,77.689 U1.55
RESET: C8.2 J1.22 P2.4 R11.2 RST1.1 U1.60 | length 33.9
  Top Layer w0.203: J1.22 96.13,74.685 96.393,74.422 96.393,70.944 RST1.1@96.273,70.824 ; v2(102.407,83.058) 102.407,86.659 P2.4 ; C8.2@102.678,70.169 C8.2 102.33,70.467 102.33,70.771 102.226,70.874 101.273,70.874 101.358,70.959 R11.2 101.727,72.39 101.947,72.61 101.947,74.636 103,75.689 U1.60 105.045,75.689 v2(105.068,75.666)
  Bottom Layer w0.203: v2(102.407,83.058) 104.82,80.645 106.045,80.645 106.553,80.137 106.553,77.597 105.068,76.112 v2(105.068,75.666)
SPI0_CLK: MPU9250.23 U1.31 | length 3.1
  Top Layer w0.203: U1.31 113.495,79.689 114.519,80.713 MPU9250.23
SPI0_CSN: MPU9250.22 U1.32 | length 2.5
  Top Layer w0.203: U1.32 113.428,80.089 114.119,80.78 MPU9250.22
SPI0_MISO: MPU9250.9 U1.30 | length 11
  Top Layer w0.203: v2(111.561,85.315) 111.561,80.448 111.348,80.235 111.348,79.543 111.602,79.289 U1.30 ; MPU9250.9 114.119,85.602 114.259,85.742 v2(114.259,85.823)
  Bottom Layer w0.203: v2(111.561,85.315) 112.069,85.823 v2(114.259,85.823)
SPI0_MOSI: MPU9250.24 U1.29 | length 3.9
  Top Layer w0.203: U1.29 113.162,78.889 114.919,80.646 MPU9250.24
SPI1_CLK: NRF24L01+.5 U1.35 | length 8.1
  Top Layer w0.203: v2(108.331,83.904) 109.799,83.904 110.277,83.426 U1.35
  Bottom Layer w0.203: NRF24L01+.5 105.263,84.615 105.263,84.598 105.957,83.904 v2(108.331,83.904)
SPI1_CSN: NRF24L01+.4 U1.36 | length 8.7
  Top Layer w0.203: v2(108.331,83.185) 108.343,83.197 109.589,83.197 109.877,82.909 U1.36
  Bottom Layer w0.203: NRF24L01+.4 104.006,84.615 104.006,84.598 105.42,83.185 v2(108.331,83.185)
SPI1_MISO: NRF24L01+.7 U1.34 | length 7.2
  Top Layer w0.203: v2(107.442,85.344) 110.528,85.344 110.677,85.195 U1.34
SPI1_MOSI: NRF24L01+.6 U1.33 | length 9.7
  Top Layer w0.203: v2(106.172,85.344) 106.172,85.614 106.381,85.823 110.852,85.823 111.077,85.598 U1.33
STDBY: TP1.5
SW_EN1: J3.3 R3.2 SB1.3 | length 19.1
  Top Layer w0.203: SB1.3 116.576,71.639 v2(116.576,72.527) 118.1,72.527 v2(118.745,71.882) ; J3.3 119.107,76.351 119.173,76.416 v2(119.253,76.416)
  Bottom Layer w0.203: R3.2 116.668,80.055 116.967,79.756 116.967,72.918 v2(116.576,72.527) ; v2(118.745,71.882) 120.142,73.279 120.142,76.151 119.877,76.416 v2(119.253,76.416)
SW_EN2: AP1.3 J3.2 SB1.2 | length 10.7
  Top Layer w0.203: SB1.2 115.232,71.196 115.48,70.947 115.48,70.607 115.602,70.485 117.157,70.485 117.381,70.709 117.381,71.64 117.624,71.882 v2(117.983,71.882) ; J3.2 119.08,75.851 119.173,75.759 v2(119.253,75.759)
  Bottom Layer w0.203: AP1.3 117.983,71.694 v2(117.983,71.882) 119.253,73.152 v2(119.253,75.759)
UART_0_RX: J1.23 P3.1 U1.21 | length 29.8
  Top Layer w0.203: J1.23 95.614,74.185 95.885,73.914 v2(95.885,71.755) 95.683,71.553 95.678,71.553 95.544,71.419 95.544,69.312 95.002,68.769 P3.1 ; v2(107.315,75.946) 110.814,75.946 111.002,75.759 111.006,75.759 111.075,75.689 U1.21
  Bottom Layer w0.203: v2(95.885,71.755) 97.79,73.66 105.029,73.66 v2(107.315,75.946)
UART_0_TX: J1.24 P3.2 U1.22 | length 31.4
  Top Layer w0.203: J1.24 94.844,73.685 95.123,73.406 v2(95.123,71.755) ; P3.2 93.157,68.921 93.157,68.975 93.68,69.498 94.864,69.498 95.214,69.847 95.214,71.664 v2(95.123,71.755) ; v2@95.157,71.755 v2(95.123,71.755) ; v2(107.442,76.581) 110.646,76.581 111.138,76.089 U1.22
  Bottom Layer w0.203: v2(95.123,71.755) 95.123,73.773 96.026,74.676 105.197,74.676 107.102,76.581 v2(107.442,76.581)
UART_1_RX: U1.10
UART_1_TX: U1.11
V_BAT: AP1.1 C3.2 J1.26 J2.1 R3.1 R4.2 R7.2 TP1.3 | length 54.7
  Top Layer w0.203: v2(89.662,72.688) 90.674,72.688 J1.26
  Bottom Layer w0.203: R7.2 92.924,73.04 J2.1 90.988,72.863 89.754,72.863 89.662,72.771 v2(89.662,72.688) 89.662,71.12 90.96,69.822 95.024,69.822 96.393,68.453 109.855,68.453 ; TP1.3 114.28,77.34 ; v2(114.427,72.688) 114.427,72.607 114.517,72.517 114.485,72.485 114.644,72.325 114.644,71.683 115.134,71.194 ; R3.1 R4.2 114.566,77.626 114.28,77.34 ; AP1.1@116.122,71.453 116.122,71.21 115.878,71.21 115.862,71.194 115.134,71.194 ; 109.855,68.453 109.347,68.961 109.347,74.297 111.002,75.952 114.046,75.952 114.28,76.187 114.28,77.34 ; 109.855,68.453 111.19,68.453 111.408,68.671 111.408,69.275 111.573,69.44 112.147,69.44 112.303,69.596 112.303,70.103 112.612,70.412 113.597,70.412 113.716,70.531 113.716,70.827 114.083,71.194 115.134,71.194
V_USB: C1.2 C4.2 D1.2 R4.1 TP1.4 | length 14.4
  Bottom Layer w0.203: C4.2 111.81,81.215 112.108,80.917 112.108,80.897 112.868,80.137 C1.2 113.095,80.187 113.393,80.485 113.593,80.485 113.879,80.772 115.062,80.772 115.316,80.518 115.316,78.986 115.435,78.867 115.939,78.867 R4.1 116.066,77.384 116.088,77.384 116.268,77.204 116.268,77.182 116.599,76.851 116.599,73.226 115.617,72.245 115.617,71.98 115.519,71.882 D1.2
Vref: C7.2 D2.1 D2.2 J1.14 R6.1 R13.2 R14.2 R15.2 R16.2 R17.2 R18.2 U1.51 | length 44.7
  Top Layer w0.203: J1.14 92.976,78.685 93.351,78.31 93.451,78.31 93.782,77.979 95.048,77.979 95.05,77.981 95.544,77.981 96.852,79.289 U1.51 107.358,79.289 v2(108.256,78.392)
  Bottom Layer w0.203: v2(93.103,78.658) v2(93.103,80.055) v2(93.103,81.452) v2(93.103,82.849) v2(93.103,84.246) v2(93.103,85.455) ; v2(108.256,78.392) 108.256,80.864 109.677,82.285 109.677,83.347 110.023,83.693 112.903,83.693 113.367,84.157 115.502,84.157 115.833,84.488 115.933,84.488 R6.1@116.181,84.736 ; C7.2 113.526,81.215 113.763,81.452 D2.1@114.181,81.452 ; D2.1 114.259,81.551 114.259,82.215 114.396,82.352 116.11,82.352 D2.2 R6.1@116.181,84.736 ; R6.1 R6.1@116.181,84.736
X32I: C15.1 U1.5 X2.2 | length 5.9
  Top Layer w0.203: U1.5 106.677,70.412 106.807,70.282 107.552,70.282 107.95,69.883 X2.2@107.95,69.694 ; X2.2 X2.2@107.95,69.694 ; C15.1@109.387,70.092 108.348,70.092 X2.2@107.95,69.694
X32O: C14.1 U1.4 X2.1 | length 5.5
  Top Layer w0.203: C14.1@104.053,70.092 105.052,70.092 105.45,69.694 106.124,69.694 106.277,69.847 U1.4
pads on no net: AP1.4 J1.25 MPU9250.2 MPU9250.3 MPU9250.4 MPU9250.5 MPU9250.6 MPU9250.7 MPU9250.14 MPU9250.15 MPU9250.16 MPU9250.17 MPU9250.19 MPU9250.21 SB1.1 U1.2 U1.6 U1.7 U1.8 U1.9 U1.28 U1.38 U1.39 U1.40 U1.64
copper on no net:
  other v3: 112.982,69.733 115.982,69.733

## Polygon pours and split planes (outlines as drawn)
GND on Top Layer "GND_L01_P084" (solid, pour order 84): 86.36,87.975 122.301,87.975 122.301,67.853 86.36,67.853
GND on Top Layer "Top Layer-GND 1" (solid, pour order 10): 86.36,87.975
GND on Bottom Layer "GND_L02_P082" (solid, pour order 82): 86.36,87.975 86.36,67.853 122.301,67.853 122.301,87.975

## Keep-outs
Keep-Out Layer:
  the board outline again, w0.254

## Other copper
Top Layer:
  pour cut-out: 111.819,85.031 116.019,85.031 116.019,80.831 111.819,80.831
  pour cut-out: 102.927,82.239 113.227,82.239 113.227,71.939 102.927,71.939

## Silkscreen, mask and mechanical layers (free items; w line width, h text height)
Top Overlay:
  drawing of 472 lines, arcs and shapes, not listed
  text "GND" at 101.346,85.979 h0.51 r270
  text "RST" at 102.616,85.979 h0.51 r270
  text "CLK" at 103.886,85.979 h0.51 r270
  text "DAT" at 105.156,85.979 h0.51 r270
  text "VDD" at 106.426,85.979 h0.51 r270
  text "Ver.1.0" at 99.136,80.162 h0.7
  text "RX0" at 92.075,70.104 h0.51
  text "TX0" at 93.853,70.104 h0.51
Bottom Overlay:
  text "GND" at 101.553,84.108 h0.51 r90
  text "VDD" at 100.143,83.958 h0.51 r90
  text "CE" at 102.664,83.958 h0.51 r90
  text "CSN" at 103.924,83.958 h0.51 r90
  text "CLK" at 105.185,83.958 h0.51 r90
  text "MOSI" at 106.445,83.958 h0.51 r90
  text "MISO" at 107.706,83.958 h0.51 r90
  text "IRQ" at 108.966,83.958 h0.51 r90
  text "-" at 90,81.534 h0.51
  text "+" at 94.953,81.534 h0.51
  text "+" at 91.059,74.295 h0.7
  text "-" at 91.059,69.85 h0.51
  text "TX0" at 93.314,69.596 h0.51
  text "RX0" at 95.275,69.596 h0.51